# Altium PCB demoboard.PcbDoc (part 2 of 2)
Units mil, origin at the board's own origin, x right, y up, seen from the top; angles counter-clockwise.
Board outline 2372.23 x 2372.23 mil, 2 copper layers (Top Layer, Bottom Layer); 93 components, 94 nets, 539 pads, 0 vias.
Unrouted connection lines stored in the file: 66.
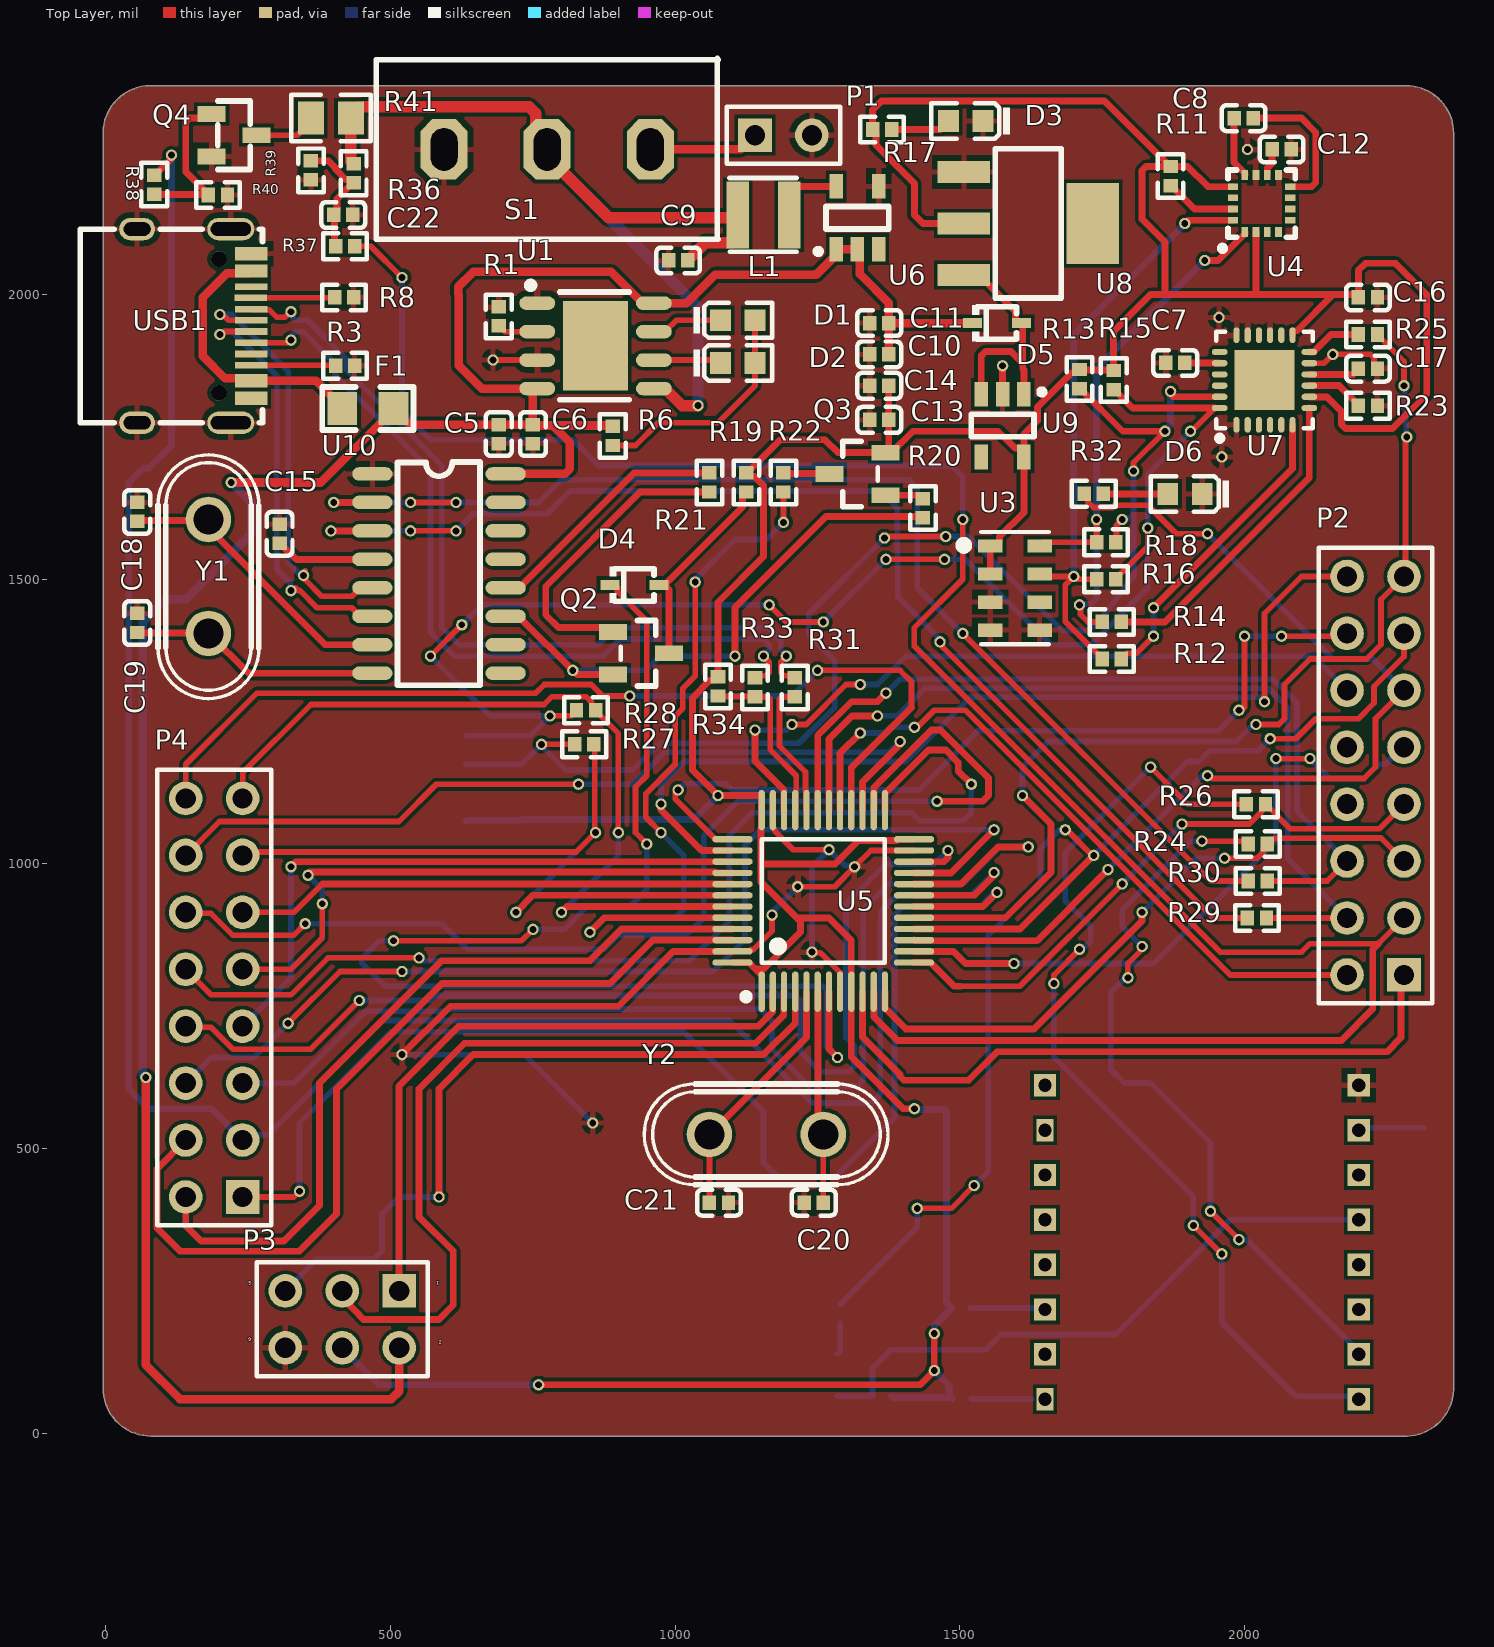
[diagram p0: Top Layer view]

## Polygon pours and split planes (outlines as drawn) (continued)
GND on Top Layer "Bottom Layer-No Net" (solid, pour order 2): -5.01,78.74 cw(c0,78.74) -4.98,79.37 cw(c0,80) -5.01,80 -5.01,2285 cw(c0,2285) -4.99,2285.5 cw(c78.74,2283.46) 76.71,2367.2 cw(c77.2,2362.2) 77.2,2367.22 2283.46,2367.22 cw(c2283.46,2283.46) 2367.22,2283.46 cw(c2362.2,2283.46) 2367.22,2283.43 2367.22,77.2 cw(c2362.2,77.2) 2367.2,76.71 cw(c2283.46,78.74) 2285.5,-4.99 cw(c2285,0) 2285,-5.01 80,-5.01 cw(c80,0) 79.37,-4.98 cw(c78.74,0) 78.74,-5.01 cw(c78.74,78.74)

## Silkscreen, mask and mechanical layers (free items; w line width, h text height)
Mechanical 1:
  lines w10: 0,78.74 ccw(c78.74,78.74) 78.74,0 ; 0,80 0,2285 ; 0,2283.46 cw(c78.74,2283.46) 78.74,2362.2 ; 77.2,2362.2 2283.46,2362.2 cw(c2283.46,2283.46) 2362.2,2283.46 2362.2,77.2 ; 80,0 2285,0 ; 2283.46,0 ccw(c2283.46,78.74) 2362.2,78.74

## Text inside footprints (layer, text, board x,y; h text height)
P3: Top Overlay "6" at 255,170 h10 r180; Top Overlay "5" at 255,270 h10 r180; Top Overlay "2" at 590,165 h10 r180; Top Overlay "1" at 585,270 h10 r180